# Altium PCB ltc1420_adc.PcbDoc
Units mil, origin at the board's own origin, x right, y up, seen from the top; angles counter-clockwise.
Board outline 1115 x 1406 mil, 4 copper layers (Top, Route2, Route3, Bottom), stack 27.165 mil thick; 18 components, 27 nets, 91 pads, 76 vias.
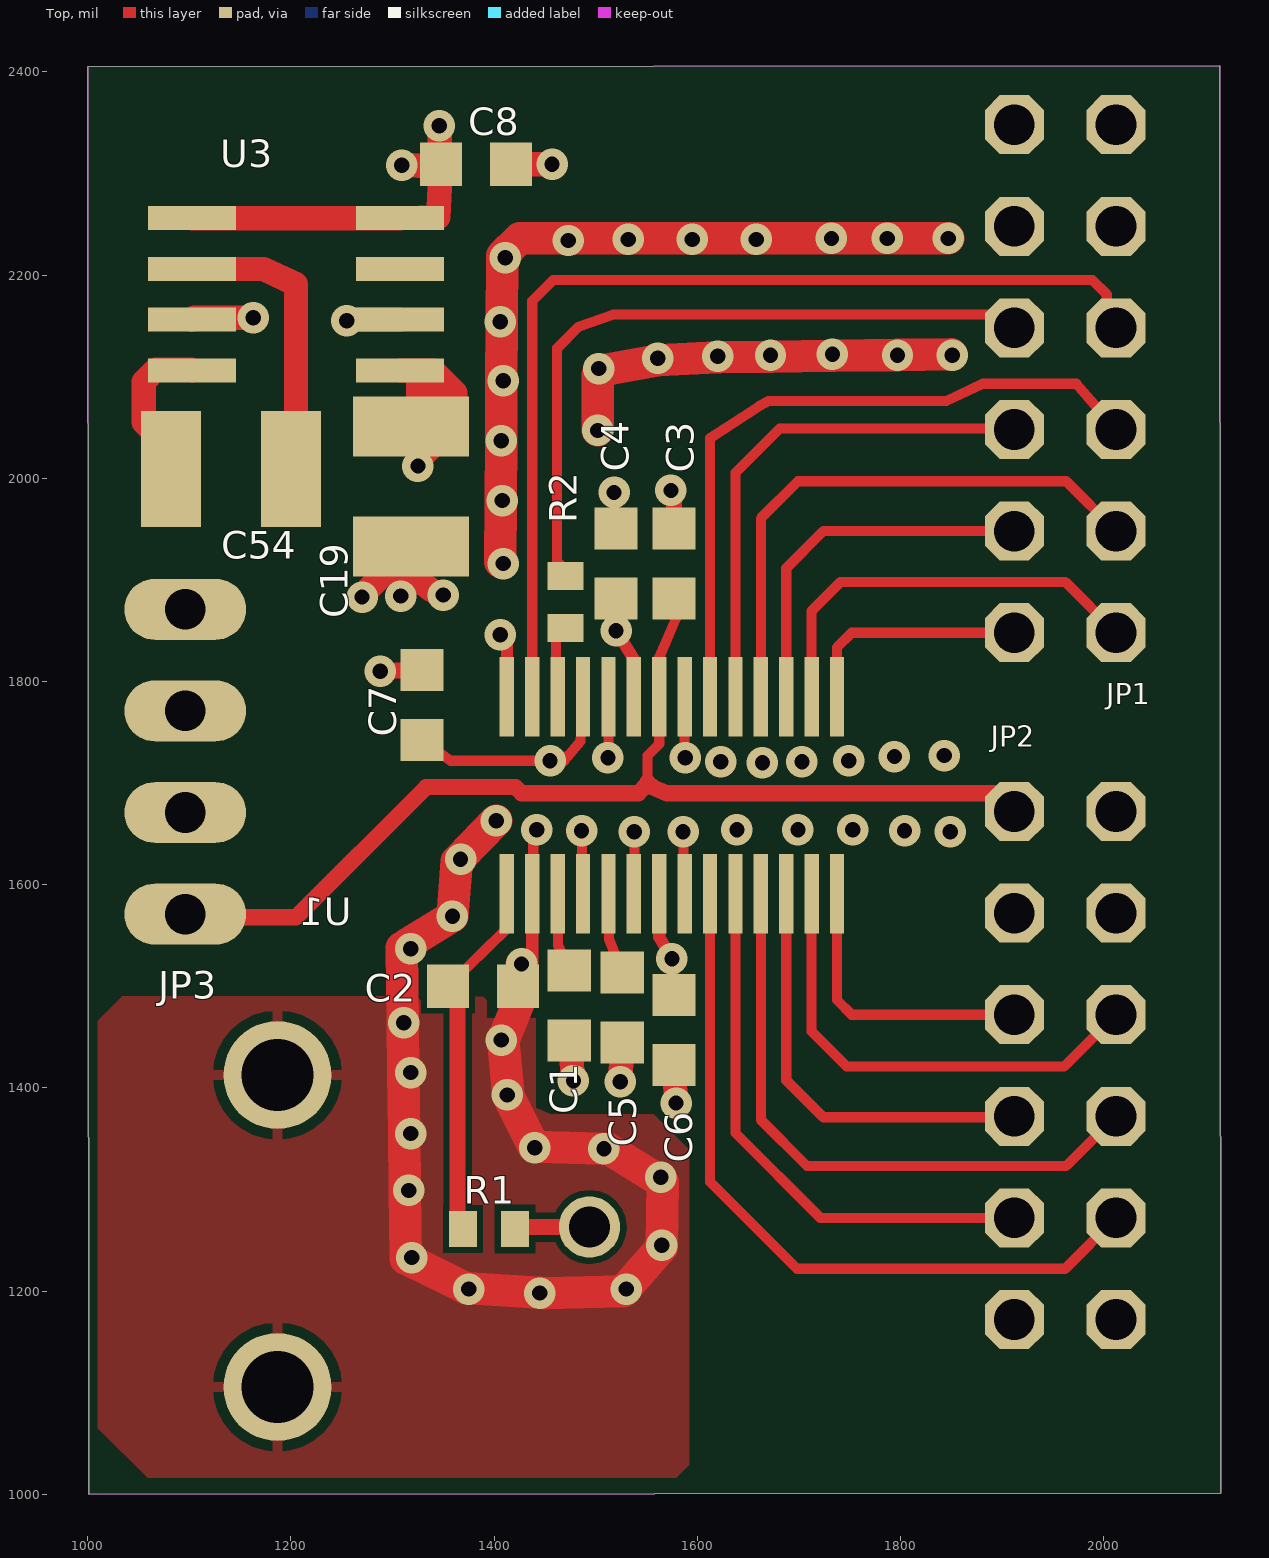
[diagram p0: Top view]
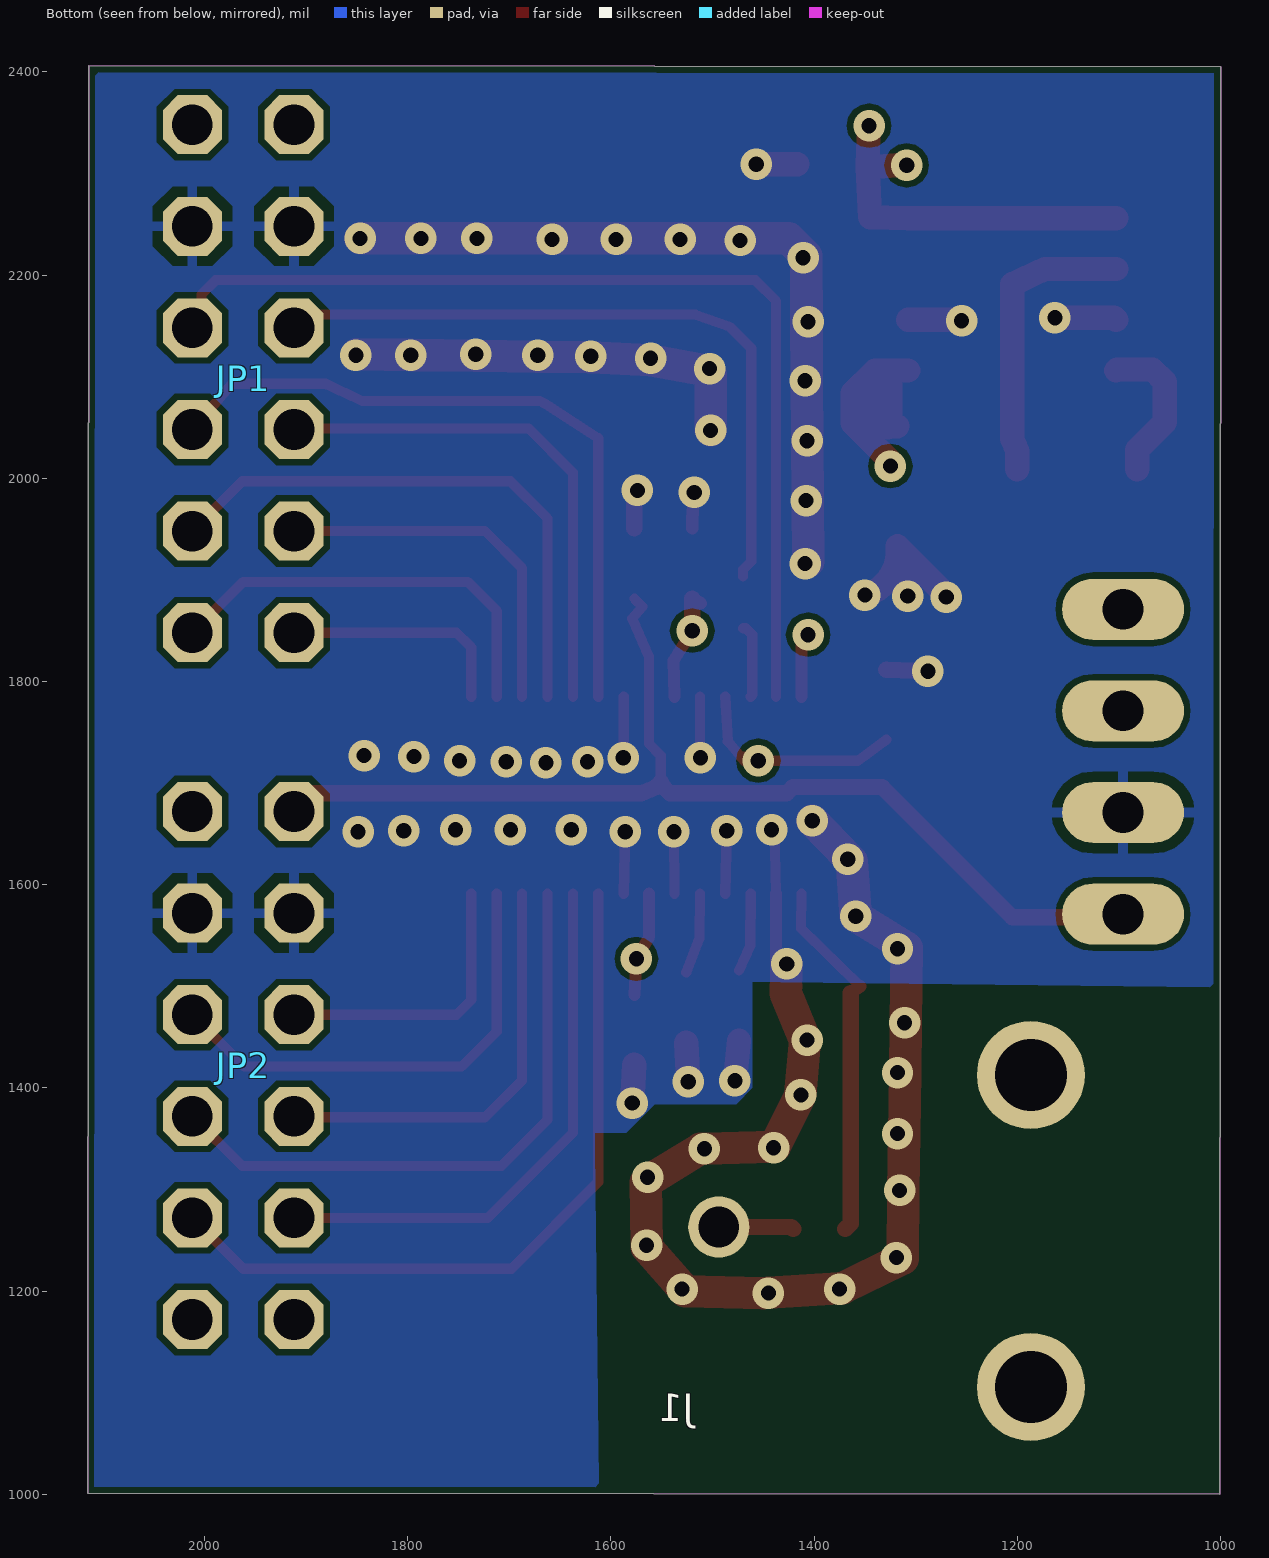
[diagram p1: Bottom view, seen from below]
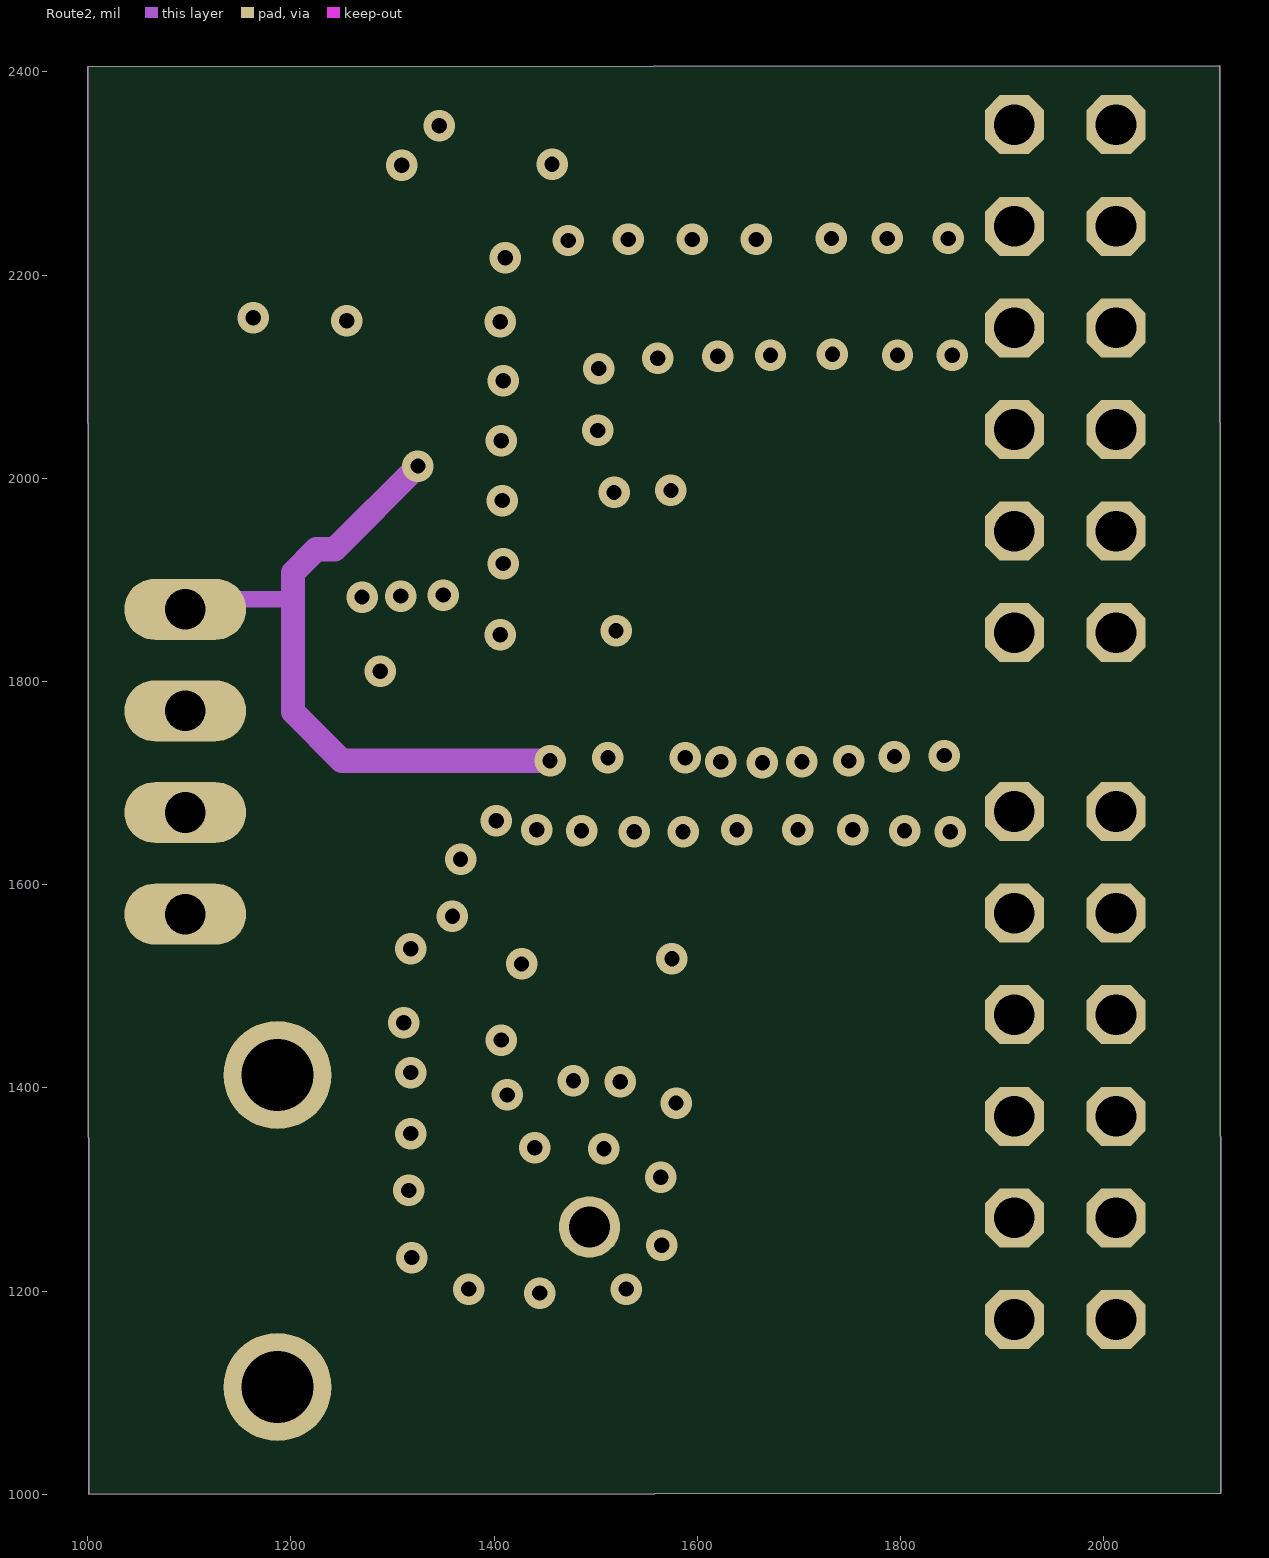
[diagram p2: Route2]
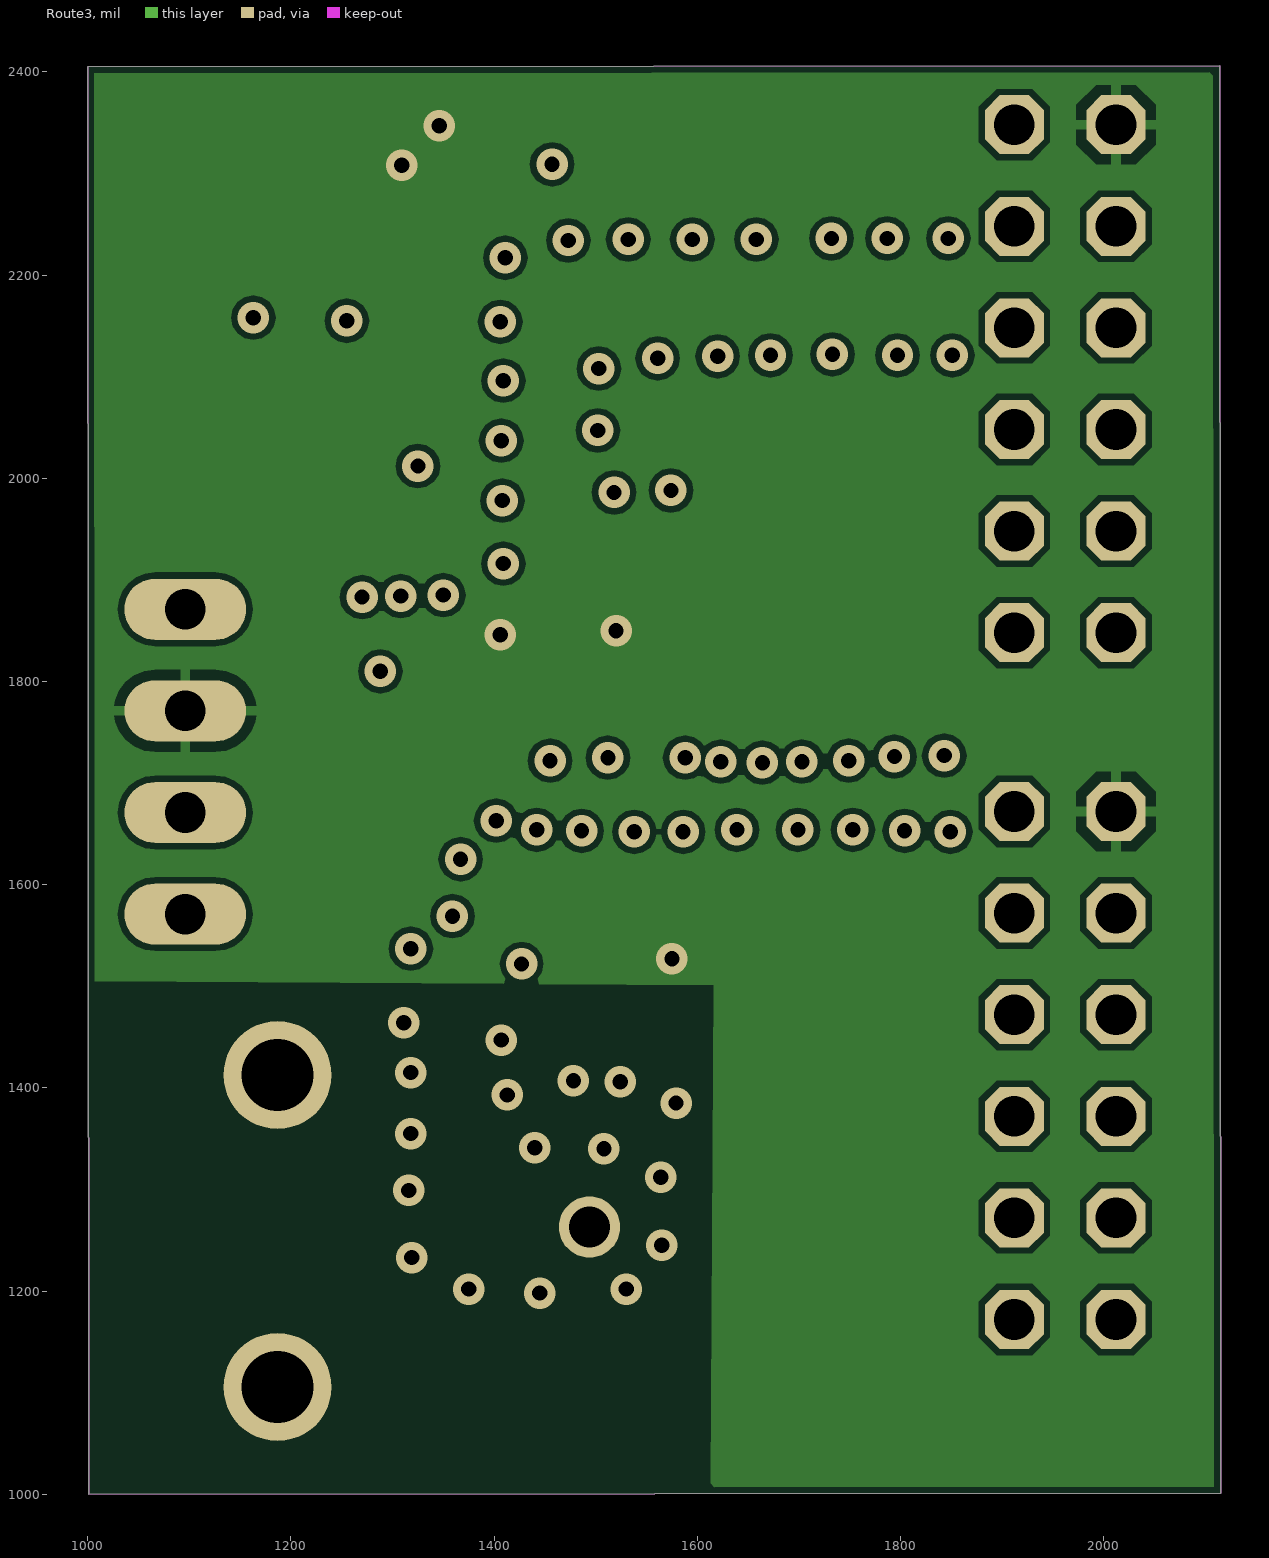
[diagram p3: Route3]

## Layer stack, top to bottom
Top Solder: solder mask 0.4, Solder Resist, Dk 3.5
Top: signal copper 1.378
Dielectric 1: prepreg 7.874, FR-4, Dk 4.8
Route2: signal copper 1.378
Dielectric 2: prepreg 7.874, FR-4, Dk 4.8
Route3: signal copper 1.378
Dielectric 3: prepreg 5.9055, FR-4, Dk 4.8
Bottom: signal copper 1.378
Bottom Solder: solder mask 0.4, Solder Resist, Dk 3.5

## Board outline
1000,2405 2114,2406 2115,1001 1001,1000

## Design rules (kind name [scope] priority, off if disabled: settings)
Clearance [All] p1: gap=6 ignorepadtopadclearanceinfootprint=FALSE
Clearance "Clearance (Same Net)" [All] p2: gap=0 ignorepadtopadclearanceinfootprint=FALSE
HoleSize HoleSize_1 [All] p1: absolutevalues=TRUE maxlimit=100000 minlimit=10 maxpercent=80.000 minpercent=20.000
HoleSize [All] p2: absolutevalues=TRUE maxlimit=100 minlimit=1 maxpercent=80.000 minpercent=20.000
HoleToHoleClearance mdViaViaSameLayer [All] p1: gap=8 allowstackedmicrovias=TRUE
HoleToHoleClearance [All] p2: gap=10 allowstackedmicrovias=TRUE
PasteMaskExpansion mlMinCreamFrame [All] p1: expansion=0
PasteMaskExpansion [All] p2: expansion=0
PolygonConnect ThermalVias [IsVia] p1: connectstyle=Direct reliefconductorwidth=10 reliefentries=4 polygonreliefangle="90 Angle" airgapwidth=10
PolygonConnect [All] p2: connectstyle=Relief reliefconductorwidth=10 reliefentries=4 polygonreliefangle="90 Angle" airgapwidth=10
RoutingVias [All] p1: holewidth=28 width=50 viastyle="Through Hole" minholewidth=28 minwidth=50 maxholewidth=28 maxwidth=50
SilkToSilkClearance [All] p1 off: silktosilkclearance=10
SilkToSolderMaskClearance [IsPad] p1 off: minsilkscreentomaskgap=10 clearancetoexposedcopper=TRUE
SolderMaskExpansion mlMinStopFrame [All] p1: expansion=0
SolderMaskExpansion [All] p2: expansion=4
Width Width_1 [All] p1: maxlimit=100000 minlimit=6 preferedwidth=10
Width [All] p2: maxlimit=10 minlimit=10 preferedwidth=10
25 further rules are at their usual default settings.

## Components (designator, comment, footprint, x,y, rotation, side; value= is the part's Value field where it differs from the comment)
C1 "1uF" C0603 1474,1481 r270 top
C2 "470pF" C0603 1389,1500 r0 top
C3 "1uF" C0603 1577,1916 r90 top
C4 "1uF" C0603 1520,1916 r90 top
C5 "1uF" C0603 1526,1479 r270 top
C6 "1uF" C0603 1577,1457 r270 top
C7 "" C0603 1329,1777 r90 top
C8 "" C0603 1382,2309 r0 top
C19 "22uF" 1210K 1318,1992 r90 top
C54 "22uF" 1210K 1141,2009 r180 top
J1 "" BNC 1297,1263 r90 bottom
JP1 "" 2X06 1962,2098 r90 bottom
JP2 "" 2X06 1962,1422 r90 bottom
JP3 "" 1X04 1096,1721 r90 top
R1 "30" R0402 1395,1261 r0 top
R2 "30" R0402 1470,1878 r270 top
U1 "" SSOP-28_GN 1575,1688 r90 top
U3 "" SO8 1206,2181 r270 top

## Footprints (in the part's own frame and the unit in brackets; to place one, negate y for a bottom-side part, rotate by r counter-clockwise, add the part's x,y. Pads: shape width x height; smd on the part's side, far side on the other; paste and mask are expansions set on the pad)
1X04 [mil] "1X04"
  oval 60x120 hole 40: 1(-150,0) 2(-50,0) 3(50,0) 4(150,0)
2X06 [mil] "2X06"
  oct 58.09x58.09 hole 40: 1(-250,-50) 2(-150,-50) 3(-50,-50) 4(50,-50) 5(150,-50) 6(250,-50) 7(-250,50) 8(-150,50) 9(-50,50) 10(50,50) 11(150,50) 12(250,50)
1210K [mil] "1210K"
  rect 59.06x114.17 smd: A(-59.06,0) C(59.06,0)
BNC [mm] "BNC"
  round 2.7 hole 1.8: GND1(-4,-2.8) GND2(3.8,-2.8)
  round 1.53 hole 1.02: SIG(0,5)
C0603 [mm] "C0603"
  rect 1.05x1.08 smd: 1(-0.875,0) 2(0.875,0)
R0402 [mm] "R0402"
  rect 0.7x0.9 smd: 1(-0.65,0) 2(0.65,0)
SO8 [mm] "SO8"
  rect 0.6x2.2 smd: 1(-1.905,-2.62) 2(-0.635,-2.62) 3(0.635,-2.62) 4(1.905,-2.62) 5(1.905,2.58) 6(0.635,2.58) 7(-0.635,2.58) 8(-1.905,2.58)
SSOP-28_GN [mil] "SSOP-28_GN"
  rect 78x14 smd: 1(-97,162.5) 2(-97,137.5) 3(-97,112.5) 4(-97,87.5) 5(-97,62.5) 6(-97,37.5) 7(-97,12.5) 8(-97,-12.5) 9(-97,-37.5) 10(-97,-62.5) 11(-97,-87.5) 12(-97,-112.5) 13(-97,-137.5) 14(-97,-162.5) 15(97,-162.5) 16(97,-137.5) 17(97,-112.5) 18(97,-87.5) 19(97,-62.5) 20(97,-37.5) 21(97,-12.5) 22(97,12.5) 23(97,37.5) 24(97,62.5) 25(97,87.5) 26(97,112.5) 27(97,137.5) 28(97,162.5)

## Part data
C1 C2 C3 C4 C5 C6 C7 C8: library part C0603
C19 C54: library part 1210K
J1: library part BNC
JP1 JP2: library part 2X06
JP3: library part 1X04
R1 R2: library part R0402
U1: library part SSOP-28_GN
U3: library part SO8

## Via types
v1: diameter 31/31/31/31 (per signal layer), hole 15, Top to Bottom, 76 vias

## Nets (pads, with @x,y where several pads share a name; then routed paths per layer and width w, separated by ;. In a path a pad name is that pad's centre, name@x,y a point inside that pad or via, vN(x,y) a via of type N, cw(c..) or ccw(c..) an arc to the next point about the centre after c; other vN are vias at no path point)
3V3: C3.1 JP2.6 JP3.1 U1.22 | length 1109.2
  Top w10: 1555,1697 1551,1701 1551,1727 1562.5,1738.5 U1.22 1562.5,1823.5 1579,1862 1569,1873.55 C3.1
  Top w16: JP3.1 1089,1571 1086,1568 1205,1568 1333,1696 1421,1696 1427,1690 1542,1690 1551,1699 1551,1701 ; 1555,1697 1555,1696 1570,1690 1903,1690 JP2.6
+5V: C4.1 C6.1 C8.1 JP1.12 JP2.12 JP3.3 U1.7 U1.23 U1.28 U3.1 U3.8 | length 650
  Top w12: v1(1406,1846) 1412.5,1839.5 U1.28 ; C4.1@1511.5,1877.05 C4.1 ; v1(1520,1850) 1538.5,1820.5 U1.23 ; U1.7 1562.5,1548.5 v1(1575,1527) C6.1
  Top w16: v1(1520,1850) C4.1
  Top w24: U3.1 U3.8 1345,2257 C8.1@1347.39,2305.68 ; v1@1308,2309 1309.08,2308.91 1347.27,2305.69 C8.1@1347.39,2305.68 ; v1(1346,2347) C8.1 C8.1@1347.39,2305.68
  other v1: 1309,2308
-5V: C7.1 C19.C JP3.4 U1.25 U3.5 | length 1233.3
  Top w10: C7.1 1357,1722 v1(1455,1722) ; U1.25 1485,1741 1472.24,1725.85 ; v1(1455,1722) 1469,1722 1472.24,1725.85 ; v1(1455,1722) 1458.85,1725.85 1472.24,1725.85
  Top w24: U3.5 U3.5@1319,2106 ; C19.C C19.C@1359.06,2051.06 ; v1(1325,2012) 1325,2017 C19.C@1359.06,2051.06 ; C19.C@1325,2060 U3.5@1325,2100 ; C19.C@1327,2050 1327,2052 1351,2076 1349,2076 U3.5@1325,2100 ; U3.5@1319,2106 1340,2106 1362,2084 1362,2054 C19.C@1359.06,2051.06 ; U3.5@1319,2106 U3.5@1325,2100
  Route2 w16: JP3.4 1106,1881 1202,1881
  Route2 w24: v1(1325,2012) 1243,1930 1225,1930 1202,1907 1202,1881 1202,1770 1250,1722 v1(1455,1722)
CLK_10MHZ: JP1.4 R2.1 | length 695.3
  Top w10: R2.1 1470,1910 1462,1918 1462,2128 1483,2149 1517,2161 1895,2161 1908,2148 JP1.4 JP1.4@1911,2149
D0: JP1.9 U1.20 | length 689
  Top w10: U1.20 1612.5,2039.5 1661,2071 1670,2076 1845,2076 1881,2093 1973,2093 JP1.9
D1: JP1.3 U1.19 | length 513.4
  Top w10: U1.19 1637.5,2005.5 1681,2049 1911,2049 JP1.3
D2: JP1.8 U1.18 | length 560.4
  Top w10: U1.18 1662.5,1960.5 1699,1997 1963,1997 JP1.8
D3: JP1.2 U1.17 | length 366.1
  Top w10: U1.17 1687.5,1911.5 1724,1948 JP1.2
D4: JP1.7 U1.16 | length 416.5
  Top w10: U1.16 1712.5,1869.5 1741,1898 1962,1898 JP1.7
D5: JP1.1 U1.15 | length 229
  Top w10: U1.15 1737.5,1833.5 1752,1848 JP1.1
D6: JP2.4 U1.14 | length 285
  Top w10: U1.14 1737.5,1486.5 1752,1472 JP2.4
D7: JP2.10 U1.13 | length 470.4
  Top w10: U1.13 1712.5,1455.5 1747,1421 1961,1421 JP2.10
D8: JP2.3 U1.12 | length 423.5
  Top w10: U1.12 1687.5,1407.5 1724,1371 1911,1371 JP2.3
D9: JP2.9 U1.11 | length 611.1
  Top w10: U1.11 1662.5,1368.5 1708,1323 1963,1323 JP2.9
D10: JP2.2 U1.10 | length 544.6
  Top w10: U1.10 1637.5,1355.5 1721,1272 JP2.2
D11: JP2.8 U1.9 | length 739.1
  Top w10: U1.9 1612.5,1307.5 1698,1222 1962,1222 JP2.8
GND: C1.2 C2.2 C3.2 C4.2 C5.2 C6.2 C7.2 C8.2 C19.A J1.GND1 J1.GND2 JP1.5 JP1.11 JP2.5 JP2.11 JP3.2 U1.2 U1.4 U1.6 U1.8 U1.21 U1.24 U3.3 U3.6 | length 3280.2
  Top w10: U1.2@1437.5,1589.74 U1.2 1439,1654 1441.7,1654.9 v1@1442,1655 ; v1(1486,1653) U1.4 ; v1(1512,1725) 1512.5,1725.5 U1.24 ; U1.6 v1(1538,1652) ; v1(1586,1652) U1.8 ; U1.21 1587.5,1725.5 v1(1588,1725)
  Top w12: C2.2 1427.77,1499.4 1437.5,1498.05 v1@1437.5,1528.5 ; v1(1427,1522) v1@1437.5,1528.5 ; U1.2 1437.5,1589.74 v1@1437.5,1528.5 ; v1(1518,1986) 1520,1960 C4.2
  Top w16: v1(1288,1810) C7.2 ; v1(1574,1988) 1577,1985 C3.2
  Top w24: U3.3 1104.85,2158 v1(1163,2158) ; v1(1255,2155) 1256,2156 U3.6 ; v1@1269,1885 1270.06,1885 C19.A@1308,1922.94 ; v1(1308,1884) C19.A@1308,1922.94 ; C19.A C19.A@1308,1922.94 ; C8.2 v1(1457,2309) ; C1.2 v1(1478,1407) ; v1(1524,1406) C5.2 ; C6.2 v1(1579,1385)
  Top w32: v1(1402,1663) 1365.95,1626.02 1363,1623 v1(1359,1569) 1315.05,1541.75 1309,1538 1309.01,1536.88 1309.97,1463.99 1310.61,1414.9 1311.39,1354.91 1312.12,1298.95 1312.99,1232.92 1313,1232 1317.44,1229.82 1372,1203 1375.05,1202.8 1445.02,1198.32 1450,1198 1527,1200 1529.31,1202.61 1565,1243 v1(1565,1245) 1566,1307 1562.32,1309.25 1512,1340 1508,1340.11 1440.03,1341.97 1439,1342 1414,1392 1413.9,1393.08 1409,1447 1428,1493 1427.77,1499.4 1427.74,1500.15 C2.2@1427,1521 ; v1@1406,1918 1406.4,1978.01 1406.79,2037 1407.18,2096.01 1407.57,2153.99 1407.99,2217.02 1408,2219 1425,2236 v1(1732,2236) v1(1787,2236) v1(1847,2236) ; v1(1502,2047) 1502,2102 1506,2106 1560,2116 1561.1,2116.05 1620.05,2118.95 1621,2119 1672.02,2119.67 1733.02,2120.47 1797,2121.31 v1@1850,2122
  other v1: 1445,1198 1375,1202 1530,1202 1319,1233 1316,1299 1564,1312 1508,1340 1440,1341 1318,1355 1413,1393 1318,1415 1407,1447 1311,1464 1318,1537 1367,1625 1849,1652 1804,1653 1442,1654 1639,1654 1699,1654 1753,1654 1664,1720 1623,1721 1703,1721 1749,1722 1794,1726 1843,1727 1270,1883 1350,1885 1409,1916 1408,1978 1407,2037 1409,2096 1503,2108 1561,2118 1620,2120 1672,2121 1797,2121 1851,2121 1733,2122 1406,2154 1411,2217 1473,2234 1532,2235 1595,2235 1658,2235
N$1: C2.1 R1.1 U1.1 | length 361.8
  Top w10: C2.1 1413,1557 U1.1
  Top w12: C2.1 C2.1@1364,1493.45
  Top w16: C2.1@1364,1493.45 1364,1266.41 R1.1
N$2: C1.1 U1.3 | length 77.9
  Top w10: U1.3 1463,1540 C1.1
N$3: J1.SIG R1.2 | length 74.1
  Top w16: R1.2 1422.59,1263 J1.SIG
N$4: C5.1 U1.5 | length 80
  Top w10: U1.5 1513,1547 C5.1
N$5: R2.2 U1.26 | length 73.3
  Top w10: U1.26 1461,1786.5 1461,1846 1467.41,1852.41 R2.2
N$6: C54.A U3.2 | length 288.5
  Top w24: U3.2 1173,2206 1205,2191 1205,2039 1200.06,2026.94 C54.A
N$7: C54.C U3.4 | length 150.4
  Top w24: C54.C 1081.94,2028.06 1055,2055 1055,2095 1067,2107 1101.85,2107 U3.4
OF: JP1.10 U1.27 | length 1006
  Top w10: U1.27 1437.5,2174.5 1458,2195 1989,2195 2003,2181 2003,2157 JP1.10
P1: JP2.1
P7: JP2.7
pads on no net: JP1.6 U3.7
copper on no net: | length 61.9
  Top w24: 1318,1932.94 ccw(c1362.66,1927.83) 1349,1885

## Polygon pours and split planes (outlines as drawn)
GND on Bottom "Bottom-GND" (solid, remove dead copper, pour order 0): 1003.02,2402 2116,2403 2117,997.02 1611.95,993.98 1617.95,1505.95 998.98,1498.95
GND on Bottom "Bottom-GND 1" (solid, remove dead copper, pour order 4): 1461,1514 1461,1399.93 1476.93,1384 1556.93,1384 1584.93,1356 1622.07,1356 1628,1361.93 1628,1519.07 1617.07,1530 1469.93,1530 1461,1521.07 1461,1515
GND on Top "Top-GND" (solid, remove dead copper, pour order 2): 1319.05,1489.02 1318.07,1490 1033.93,1490 1010,1466.07 1010,1064.93 1058.93,1016 1579.07,1016 1592,1028.93 1592,1339.07 1557.07,1374 1456.01,1374 1441,1380.32 1441,1483.68 1420.74,1490.01
+5V on Route3 "Route3-+5V" (solid, remove dead copper, pour order 6): 1000.01,2405 2113,2406 2114,1000.04 1612.98,994.96 1615.98,1501.03 997.99,1505.03

## Keep-outs
Keep-Out Layer:
  the board outline again, w0

## Silkscreen, mask and mechanical layers (free items; w line width, h text height)
Dimension:
  the board outline again, w0
Top Assembly:
  text "5V" at 2086,2328 h37.2 r90
  text "3V3" at 1857,2314 h37.2 r90
  text "GND" at 1858,2223 h37.2 r90
  text "GND" at 2083,2218 h37.2 r90
  text "-5V" at 1206,1823 h49.6 r90
  text "+5V" at 1209,1724 h49.6 r90
  text "5V" at 2089,1655 h37.2 r90
  text "3V3" at 1853,1642 h37.2 r90
  text "GND" at 1206,1623 h49.6 r90
  text "GND" at 2087,1539 h37.2 r90
  text "GND" at 1855,1537 h37.2 r90
  text "3V3" at 1206,1524 h49.6 r90
  text "LTC1420 Rev 0" at 1631,1082 h49.6
  text "June 2017" at 1622,1039 h49.6

## Text inside footprints (layer, text, board x,y; h text height)
C19: Top Assembly "+ +" at 1303.62,1868.57 h37.2
C54: Top Assembly "+ +" at 1264.43,1994.62 h37.2 r90